# Altium PCB charger.PcbDoc (part 1 of 2)
Units mil, origin at the board's own origin, x right, y up, seen from the top; angles counter-clockwise.
Board outline 4340.74 x 2765.92 mil, 2 copper layers (Top Layer, Bottom Layer); 142 components, 73 nets, 399 pads, 1053 vias.
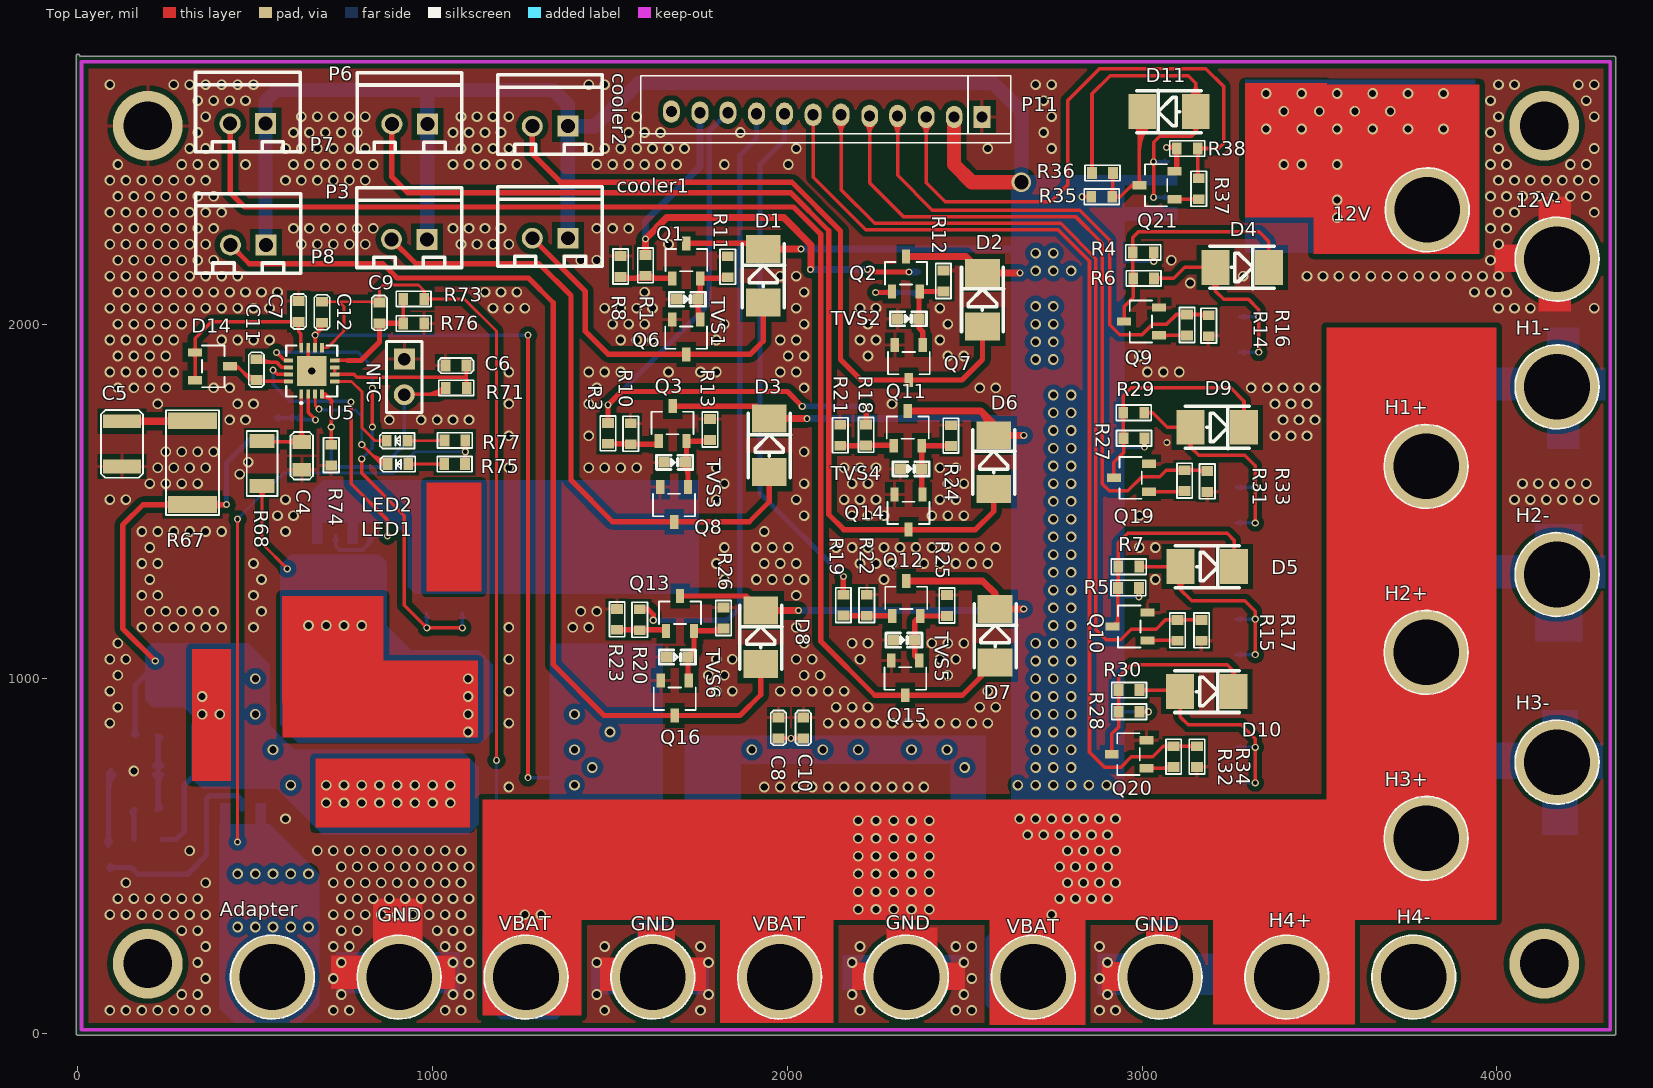
[diagram p0: Top Layer view]
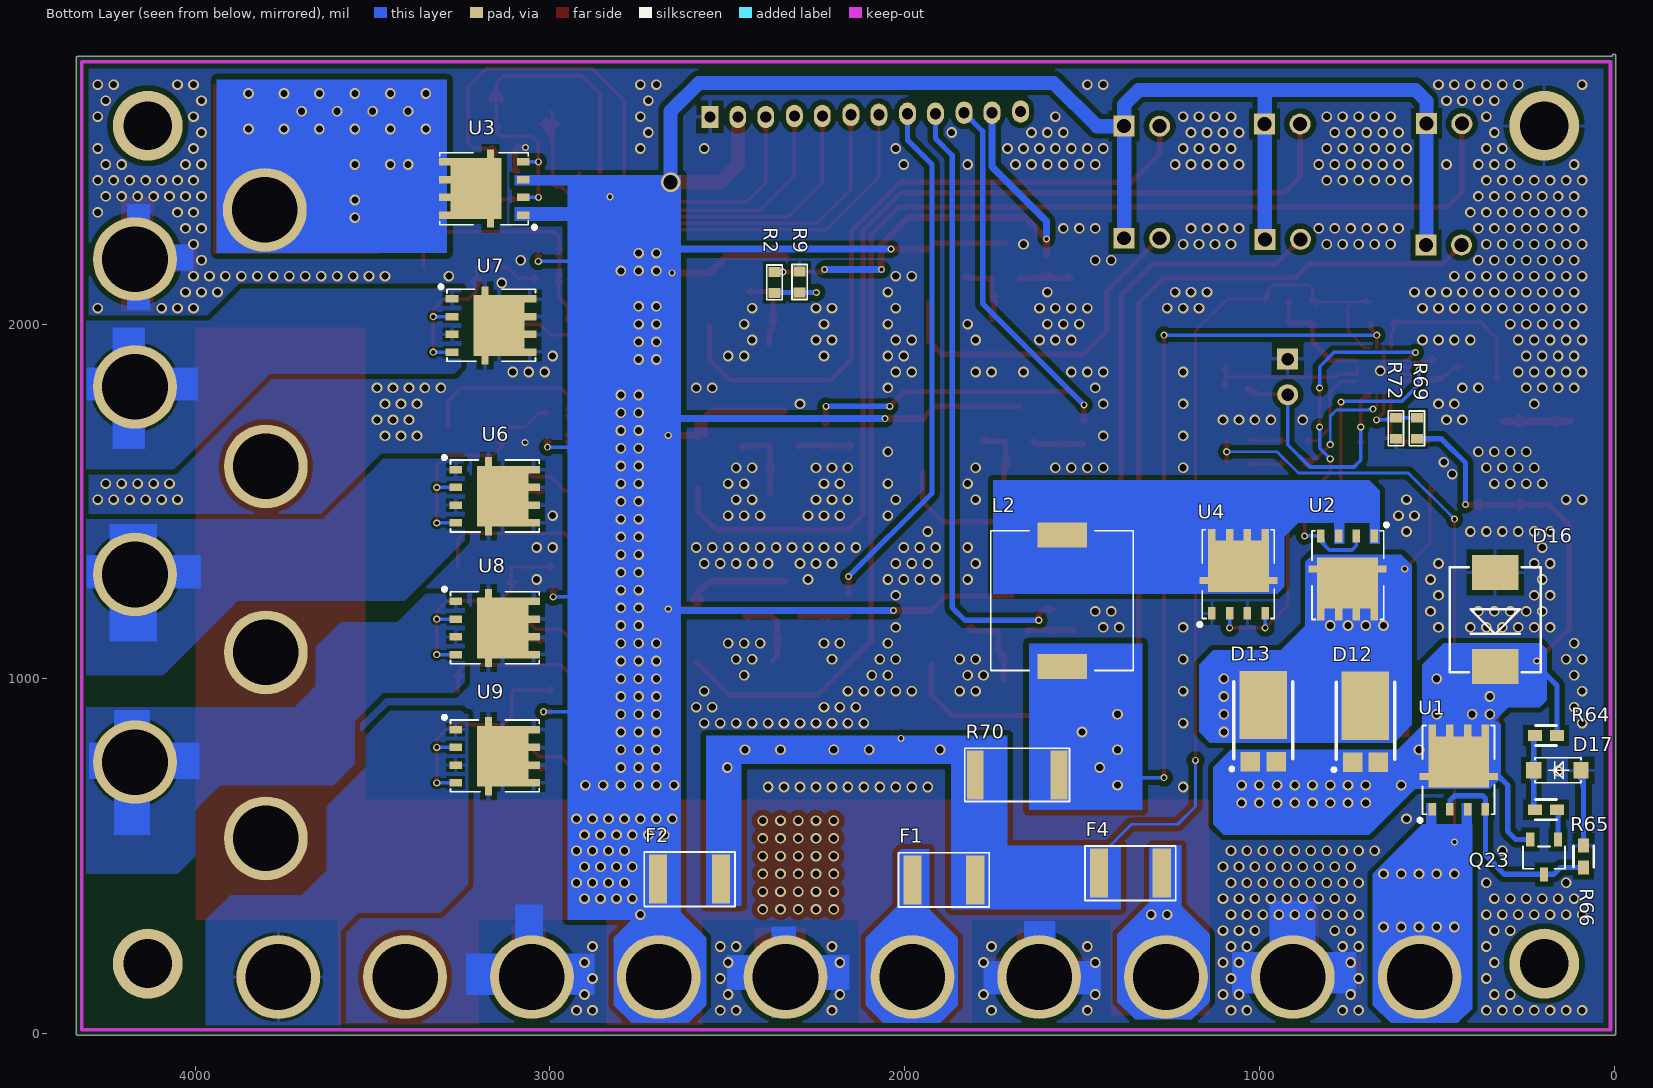
[diagram p1: Bottom Layer view, seen from below]

## Layer stack, top to bottom
Top Layer: signal copper 1.4
Dielectric: dielectric 12.6, FR-4, Dk 4.8
Bottom Layer: signal copper 1.4

## Board outline
-5.02,0 ccw(c0,0) 0,-5.02 4330.71,-5.02 ccw(c4330.71,0) 4335.72,0 4335.72,2750 ccw(c4330.71,2750) 4330.71,2755.02 5.02,2755.02 5.02,2755.91 ccw(c0,2755.91) -5.02,2755.91

## Design rules (kind name [scope] priority, off if disabled: settings)
Clearance Clearance_1 [InPolygon And InNet(GND)] p1: gap=15
Clearance [All] p2: gap=8
PolygonConnect PolygonConnect_1 [IsVia] p1: connectstyle=Direct reliefconductorwidth=10 reliefentries=4 polygonreliefangle="90 Angle"
PolygonConnect [All] p2: connectstyle=Relief reliefconductorwidth=10 reliefentries=4 polygonreliefangle="90 Angle"
RoutingVias [All] p1: holewidth=28 width=50 viastyle="Through Hole" minholewidth=28 minwidth=50 maxholewidth=28 maxwidth=50
SilkscreenOverComponentPads [IsPad] p1: minsilkscreentomaskgap=2
SolderMaskExpansion [All] p1: expansion=4
Width [All] p1: maxlimit=300 minlimit=5 preferedwidth=10
27 further rules are at their usual default settings.

## Classes and differential pairs
component class drv: 12V 12V- cooler1 cooler2 D1 D2 D3 D4 D5 D6 D7 D8 D9 D10 D11 H1+ H1- H2+ H2- H3+ H3- H4+ H4- P3 P6 P7 P8 P11 Q1 Q2 Q3 Q6 Q7 Q8 Q9 Q10 Q11 Q12 Q13 Q14 Q15 Q16 Q19 Q20 Q21 R1 R2 R3 R4 R5 R6 R7 R8 R9 R10 R11 R12 R13 R14 R15 R16 R17 R18 R19 R20 R21 R22 R23 R24 R25 R26 R27 R28 R29 R30 R31 R32 R33 R34 R35 R36 R37 R38 TVS1 TVS2 TVS3 TVS4 TVS5 TVS6 U3 U6 U7 U8 U9
component class charger: Adapter C4 C5 C6 C7 C8 C9 C10 C11 C12 D12 D13 D14 D16 D17 F1 F2 F4 GND L2 LED1 LED2 NTC Q23 R64 R65 R66 R67 R68 R69 R70 R71 R72 R73 R74 R75 R76 R77 U1 U2 U4 U5 VBAT
component class "New Class": 12V 12V- Adapter H1+ H1- H2+ H2- H3+ H3- H4+ H4- VBAT

## Components (designator, comment, footprint, x,y, rotation, side; value= is the part's Value field where it differs from the comment)
12V "12V" FIX-4.5 3804,2322 r0 top locked (schematic designator T1)
12V- "12V-" FIX-4.5 4170,2183 r0 top locked (schematic designator T2)
Adapter "12V" FIX-4.5 548,159 r0 top locked (schematic designator T4)
C4 "1uF/25V" 0805C 631,1668 r270 top
C5 "2.2uF/25V" 1210C 124,1726 r270 top
C6 "1uF/25V" 0603C 1036.06,1883 r0 top
C7 "1uF/25V" 0603C 622,2006 r90 top
C8 "10uF/25V" 0603C 1975,891 r270 top
C9 "22pF" 0603C 850,2002 r90 top
C10 "10uF/25V" 0603C 2045,891 r270 top
C11 "0.1uF/25V" 0603C 503,1901 r270 top
C12 "0.1uF/25V" 0603C 688,2063 r270 top
cooler1 "SIP-2" SIP-2A 1331,2242 r180 top (schematic designator P1)
cooler2 "SIP-2" SIP-2A 1331,2558 r180 top (schematic designator P2)
D1 "1N4007" DO-214-AC 1932,2136 r90 top
D2 "1N4007" DO-214-AC 2550,2069 r90 top
D3 "1N4007" DO-214-AC 1949,1658 r90 top
D4 "1N4007" DO-214-AC 3282,2160 r0 top
D5 "1N4007" DO-214-AC 3184,1316 r0 top
D6 "1N4007" DO-214-AC 2582,1611 r90 top
D7 "1N4007" DO-214-AC 2586,1121 r90 top
D8 "1N4007" DO-214-AC 1925,1117 r90 top
D9 "1N4007" DO-214-AC 3212,1709 r0 top
D10 "1N4007" DO-214-AC 3183,964 r0 top
D11 "1N4007" DO-214-AC 3076,2599 r180 top
D12 "PDS1040-13" POWERDI-5_L5.4-W4.0-LS6.5-RD 701,844 r270 bottom
D13 "PDS1040-13" POWERDI-5_L5.4-W4.0-LS6.5-RD 989,846 r270 bottom
D14 "bat54c" sot23-3 330.35,1920 r180 top
D16 "SMCJ28CA" SMC 335,1300 r270 bottom
D17 "BZT52C27" sod123 93,742 r0 bottom
F1 "1812L300/16GR" 1812-F 1978,433 r180 bottom
F2 "1812L300/16GR" 1812-F 2695,435 r180 bottom
F4 "1812L300/16GR" 1812-F 1275,452 r0 bottom
GND "GND" FIX-4.5 905.56,159 r0 top locked (schematic designator T5)
GND "GND" FIX-4.5 2335.78,159 r180 top locked (schematic designator T6)
GND "GND" FIX-4.5 3050.89,159 r180 top locked (schematic designator T8)
GND "GND" FIX-4.5 1620.67,159 r180 top locked (schematic designator T10)
H1+ "12V" FIX-4.5 3801,1598.67 r180 top locked
H1- "12V" FIX-4.5 4170,1823 r270 top locked
H2+ "12V" FIX-4.5 3801,1074.33 r270 top locked
H2- "12V" FIX-4.5 4170,1294 r270 top locked
H3+ "12V" FIX-4.5 3801,550 r270 top locked
H3- "12V" FIX-4.5 4170,765 r270 top locked
H4+ "12V" FIX-4.5 3408.44,159 r270 top locked
H4- "12V" FIX-4.5 3766,159 r270 top locked
L2 "SMMS1040-3R3M" MSS1038 1556,1405 r270 bottom
LED1 "5V" 0603LED 931.45,1605.22 r180 top
LED2 "5V" 0603LED 929.45,1671.22 r180 top
NTC "NCP18XH103F03RB" HDR1X2 920,1901 r270 top
P3 "SIP-2" SIP-2A 934,2239 r180 top
P6 "SIP-2" SIP-2A 935,2564 r180 top
P7 "SIP-2" SIP-2A 479,2565 r180 top
P8 "SIP-2" SIP-2A 480,2223 r180 top
P11 "Header 11" 12X2MMZ 2549,2584 r180 top
Q1 "BC817-16" SOT23-3 1676,2129 r270 top
Q2 "BC817-16" SOT23-3 2295,2092 r270 top
Q3 "BC817-16" SOT23-3 1637,1670 r270 top
Q6 "AO3400" SOT23-3 1754,2013 r90 top
Q7 "AO3400" SOT23-3 2382,1941 r90 top
Q8 "AO3400" SOT23-3 1720,1541 r90 top
Q9 "S8050" SOT23-3 3048,1968 r0 top
Q10 "S8050" SOT23-3 3015,1108 r0 top
Q11 "BC817-16" SOT23-3 2300,1657 r270 top
Q12 "BC817-16" SOT23-3 2296,1177 r270 top
Q13 "BC817-16" SOT23-3 1658,1135 r270 top
Q14 "AO3400" SOT23-3 2381,1519 r90 top
Q15 "AO3400" SOT23-3 2372,1052 r90 top
Q16 "AO3400" SOT23-3 1722,995 r90 top
Q19 "S8050" SOT23-3 3019,1527 r0 top
Q20 "S8050" SOT23-3 3013,748 r0 top
Q21 "S8050" SOT23-3 3091,2352 r0 top
Q23 "MMBT4403-7-F" SOT23-3 158,547 r90 bottom
R1 "100R" 0603R 1600,2136 r90 top
R2 "100R" 0603R 2367,2087.94 r90 bottom
R3 "100R" 0603R 1494.35,1662.32 r90 top
R4 "10K" 0603R 2974,2202 r0 top
R5 "10K" 0603R 2932,1256 r0 top
R6 "100" 0603R 2975,2129 r0 top
R7 "100" 0603R 2933,1316 r0 top
R8 "10K" 0603R 1530,2192 r270 top
R9 "10K" 0603R 2296,2148.06 r270 bottom
R10 "10K" 0603R 1558.35,1720.32 r270 top
R11 "10K" 0603R 1832,2132 r90 top
R12 "10K" 0603R 2440,2092 r90 top
R13 "10K" 0603R 1782,1673 r90 top
R14 "1K" 0603R 3127,1968 r90 top
R15 "1K" 0603R 3100,1107 r90 top
R16 "1K" 0603R 3188,2025 r270 top
R17 "1K" 0603R 3168,1166 r270 top
R18 "100R" 0603R 2222,1658 r90 top
R19 "100R" 0603R 2158,1178 r90 top
R20 "100R" 0603R 1584,1137 r90 top
R21 "10K" 0603R 2149,1716 r270 top
R22 "10K" 0603R 2224,1237 r270 top
R23 "10K" 0603R 1520,1197 r270 top
R24 "10K" 0603R 2461,1656 r90 top
R25 "10K" 0603R 2450,1177 r90 top
R26 "10K" 0603R 1820,1142 r90 top
R27 "10K" 0603R 2948,1678 r0 top
R28 "10K" 0603R 2934,907 r0 top
R29 "100" 0603R 2947,1750 r0 top
R30 "100" 0603R 2934,968 r0 top
R31 "1K" 0603R 3120,1529 r90 top
R32 "1K" 0603R 3089,751 r90 top
R33 "1K" 0603R 3184,1586 r270 top
R34 "1K" 0603R 3155,810 r270 top
R35 "10K" 0603R 2916,2359 r180 top
R36 "100" 0603R 2918,2426 r180 top
R37 "1K" 0603R 3160,2352 r90 top
R38 "10K" 0603R 3157,2495 r180 top
R64 "100k" RESC1608X055N_0603 192,840 r180 bottom
R65 "1k/1%" RESC1608X055N_0603 192,631 r180 bottom
R66 "10k" RESC1608X055N_0603 86,499 r90 bottom
R67 "2/1W" 2512R 323,1491 r90 top
R68 "10/1/4W" 1206R 519,1543 r90 top
R69 "215k" 0603R 555.65,1676.56 r90 bottom
R70 "5mR" 2512R 1565,729 r0 bottom
R71 "5.23K" 0603R 1096.06,1820 r180 top
R72 "11.8K" 0603R 615,1736 r270 bottom
R73 "698K" 0603R 976,2071 r180 top
R74 "30.1K" 0603R 714,1660 r270 top
R75 "1k/1%" 0603R 1032.45,1605.22 r0 top
R76 "100K" 0603R 917,2001.65 r0 top
R77 "1k/1%" 0603R 1033,1672 r0 top
TVS1 "ESD5Z5.0CT1G" SOD-523 1718,2070 r0 top
TVS2 "ESD5Z5.0CT1G" SOD-523 2341,2015 r0 top
TVS3 "ESD5Z5.0CT1G" SOD-523 1682,1610 r0 top
TVS4 "ESD5Z5.0CT1G" SOD-523 2349,1592 r0 top
TVS5 "ESD5Z5.0CT1G" SOD-523 2329,1109 r0 top
TVS6 "ESD5Z5.0CT1G" SOD-523 1690,1061 r0 top
U1 "Si7997DP" "PowerPAK SO-8" 539,595 r90 bottom
U2 "Si7288DP" "PowerPAK SO-8" 650,1440 r270 bottom
U3 "Si7997DP" "PowerPAK SO-8" 3038,2281 r0 bottom
U4 "Si7288DP" "PowerPAK SO-8" 1160,1147 r90 bottom
U5 "BQ24650RVAR" VQFN-16_L3.6-W3.6-P0.50-BL-EP 659,1868 r0 top
U6 "Si7997DP" "PowerPAK SO-8" 3303.5,1615.81 r180 bottom
U7 "Si7997DP" "PowerPAK SO-8" 3313.5,2097.21 r180 bottom
U8 "Si7997DP" "PowerPAK SO-8" 3303.5,1244.4 r180 bottom
U9 "Si7997DP" "PowerPAK SO-8" 3303.5,883 r180 bottom
VBAT "12V" FIX-4.5 1263.11,159 r180 top locked (schematic designator T3)
VBAT "12V" FIX-4.5 1978.22,159 r180 top locked (schematic designator T7)
VBAT "12V" FIX-4.5 2693.33,159 r180 top locked (schematic designator T9)

## Footprints (in the part's own frame and the unit in brackets; to place one, negate y for a bottom-side part, rotate by r counter-clockwise, add the part's x,y. Pads: shape width x height; smd on the part's side, far side on the other; paste and mask are expansions set on the pad)
12X2MMZ [mm]
  rect 1.2x1.6 hole 0.8: 1(0,0)
  oval 1.2x1.6 hole 0.8: 2(2,0) 3(4,0) 4(6.05,-0.076) 5(8.05,-0.076) 6(10.1,-0.152) 7(12.1,-0.152) 8(14.15,-0.229) 9(16.15,-0.229) 10(18.2,-0.305) 11(20.2,-0.305) 12(22.25,-0.381)
  silkscreen extent -2.05,-2.95 24.43,1.85
0603C [mm]
  rect 0.7x0.85 smd: 1(0,0) 2(1.5,0)
  silkscreen extent -0.5,-0.55 2,0.55
0603LED [mm]
  rect 0.7x0.85 smd: 1(0,0) 2(1.5,0)
  silkscreen extent -0.5,-0.55 2,0.55
0603R [mm]
  rect 0.7x0.85 smd: 1(0,0) 2(1.5,0)
  silkscreen extent -0.5,-0.55 2,0.55
0805C [mm]
  rect 1x1.3 smd: 1(0,0) 2(2,0)
  silkscreen extent -0.7,-0.8 2.7,0.8
1206R [mm]
  rect 1x1.8 smd: 1(0,0) 2(3.25,0)
  silkscreen extent -0.7,-1.1 3.95,1.1
1210C [mm]
  rect 1x2.7 smd: 1(0,0) 2(3.25,0)
  silkscreen extent -0.8,-1.5 4.05,1.5
1812-F [mm]
  rect 1.3x3.5 smd: 1(0,0) 2(4.5,0)
  silkscreen extent -1,-1.95 5.5,1.95
2512R [mm]
  rect 1.2x3.5 smd: 1(0,0) 2(6,0)
  silkscreen extent -0.75,-1.9 6.75,1.9
DO-214-AC [mm]
  rect 2x2.5 smd: 1(-1.915,0) 2(1.915,0)
  silkscreen extent -2.3,-1.52 2.3,1.5, body extent -2.3,-1.35 2.3,1.35, height 2.4
FIX-4.5 [mm]
  round 6 hole 4.7: 1(0,0)
  silkscreen extent -3,-3 3,3
HDR1X2 [mm] "Connector; Header; 2 Position"
  rect 1.5x1.5 hole 0.9: 1(0,0)
  round 1.5 hole 0.9: 2(2.54,0)
  silkscreen extent -1.27,-1.27 3.81,1.27
MSS1038 [mm]
  rect 1.78x3.56 smd: 1(0,0) 2(9.4,0)
  silkscreen extent -0.3,-5.11 9.7,5.09
POWERDI-5_L5.4-W4.0-LS6.5-RD [mm]
  rect 1.4x1.4 smd: 1(2.032,-0.92) 2(2.032,0.92)
  rect 4.9x3.4 smd: 3(-2.032,0)
  silkscreen extent -3.7,-2.37 2.67,2.1
"PowerPAK SO-8" [mm]
  rect 0.9x0.54 smd: 1(0.95,-0.67) 2(0.95,-1.94) 3(0.95,-3.21) 4(0.95,-4.48) 5(6.548,-4.48) 6(6.548,-3.21) 7(6.548,-1.94) 8(6.548,-0.67)
  rect 0.5x1.6 smd: 5(3.3,-4.575) 8(3.3,-0.575)
  rect 3.66x2.5 smd: 5(4.325,-3.495)
  rect 3.66x2 smd: 8(4.325,-1.401)
  silkscreen extent 0.03,-5.12 6.93,0.33
RESC1608X055N_0603 [mil] "Chip Resistor, 0603"
  round 10 on Mech3: 0(0,0)
  rect 40x30 smd: 1(-30.98,0) 2(30.98,0)
  silkscreen extent -30,-29 30,29, body extent -31,-16 31,16, height 22
SIP-2A [mm]
  rect 1.5x1.5 hole 1: 1(-1.27,0)
  round 1.5 hole 1: 2(1.27,0)
  silkscreen extent -3.75,-3.68 3.75,2.02, body extent -3.7,-3.81 3.7,2.29, height 7.5
SMC [mm]
  rect 2.5x3.3 smd: 1(0,0) 2(6.75,0)
  silkscreen extent -0.35,-3.25 7.15,3.25
sod123 [mm]
  rect 1.1x1.2 smd: 1(0,0) 2(3.385,0)
  silkscreen extent 0,-0.9 3.3,0.9
SOD-523 [mil]
  rect 31.5x30 smd: 1(-30,0) 2(30,0)
  silkscreen extent -51,-20 51,20, body extent -31,-16 31,16, height 26
sot23-3 [mm]
  rect 1x0.6 smd: 1(0,0) 2(0,2) 3(-2.5,1)
  silkscreen extent -2.1,-0.5 -0.5,2.5
SOT23-3 [mm]
  rect 1x0.6 smd: 1(0,0) 2(0,2) 3(-2.5,1)
  silkscreen extent -2.1,-0.5 -0.5,2.5
VQFN-16_L3.6-W3.6-P0.50-BL-EP [mm]
  rect 0.28x0.665 smd: 1(-0.75,-1.658) 2(-0.25,-1.658) 3(0.25,-1.658) 4(0.75,-1.658) 9(0.75,1.658) 10(0.25,1.658) 11(-0.25,1.658) 12(-0.75,1.658)
  rect 0.665x0.28 smd: 5(1.658,-0.75) 6(1.658,-0.25) 7(1.658,0.25) 8(1.658,0.75) 13(-1.658,0.75) 14(-1.658,0.25) 15(-1.658,-0.25) 16(-1.658,-0.75)
  rect 2.14x2.14 smd: 17(0,0)
  silkscreen extent -1.83,-2.36 1.83,1.83

## Part data
12V 12V- Adapter GND GND GND GND H1+ H1- H2+ H2- H3+ H3- H4+ H4- VBAT VBAT VBAT: library part TP
C4 C5 C6 C7 C8 C9 C10 C11 C12: library part CAP, "Capacitor"
cooler1 cooler2 P3 P6 P7 P8: "XH2.54 2P 立贴"
D1 D2 D3 D4 D5 D6 D7 D8 D9 D10 D11: library part DIODE2, "贴片二极管"
D14: library part PDS1040-13
D16: library part "DIODE S", "Schottky Diode"
D17: library part BZT52C12S-7-F
F1 F2 F4: library part "Fuse 1", "Fuse"
L2: library part INDUCTOR
LED1 LED2: library part LED
NTC: library part "Header 2", "XH2.54 2P 立贴"
P11: "Header, 11-Pin"
Q1 Q2 Q3 Q11 Q12 Q13: library part NPN-1, "三极管"
Q6 Q7 Q8 Q14 Q15 Q16: library part "MOSFET N", "MOSFET N"
Q9 Q10 Q19 Q20 Q21: library part NPN, "NPN Bipolar Transistor"
Q23: library part OEM_Diodes_MMBT4403
R1 R2 R3 R6 R7 R8 R9 R10 R11 R12 R13 R18 R19 R20 R21 R22 R23 R24 R25 R26 R29 R30 R36: library part RES-SOP, "贴片电阻 5%"
R4 R5 R14 R15 R16 R17 R27 R28 R31 R32 R33 R34 R35 R37 R38 R67 R68 R69 R70 R71 R72 R73 R74 R76: library part Res1, "Resistor"
R64 R65 R66: library part Resistor_0603
R75 R77: library part R
TVS1 TVS2 TVS3 TVS4 TVS5 TVS6: library part TVS-1, "TVS"
U1 U3 U6 U7 U8 U9: "Sia430DJ"
U2 U4: library part Si7997DP, "Sia430DJ"

## Free pads (board coordinates)
  round 196.85 hole 137.8: 1(196.85,196.85) 1(196.85,2559.06) 1(4133.86,196.85) 1(4133.86,2559.06)

## Via types
v1: diameter 30, hole 20, Top Layer to Bottom Layer, tented both sides, 995 vias
v2: diameter 20, hole 12, Top Layer to Bottom Layer, tented both sides, 57 vias
v3: diameter 55, hole 40, Top Layer to Bottom Layer, tented both sides, 1 vias

## Nets (pads, with @x,y where several pads share a name; then routed paths per layer and width w, separated by ;. In a path a pad name is that pad's centre, name@x,y a point inside that pad or via, vN(x,y) a via of type N, cw(c..) or ccw(c..) an arc to the next point about the centre after c; other vN are vias at no path point)
AIR_12V: 12V.1 U3.5 U3.6 U3.7 U3.8
  other v1: 3550,2300 3550,2350 3400,2450 3450,2450 3550,2450 3350,2550 3450,2550 3550,2550 3650,2550 3750,2550 3850,2550 3400,2600 3500,2600 3600,2600 3700,2600 3350,2650 3450,2650 3550,2650 3650,2650 3750,2650 3850,2650
AIR_PWR: P11.3 R37.2 R38.1 | length 1856.5
  Top Layer w10: P11.3@2378.35,2562.96 cw(c2346.56,2531.17) 2391.52,2531.17 cw(c2436.48,2531.17) P11.3@2404.69,2562.96 ; P11.3@2391.52,2584 2391.52,2398.48 2445,2345 2743,2345 2790,2392 2790,2630 2880,2720 3180,2720 3230,2670 3230,2510 3215,2495 R38.1@3157,2495 3157,2414.06 R37.2@3160,2411.06 ; R38.1@3150.79,2485.84 cw(c3135.8,2470.85) 3157,2470.85 cw(c3178.2,2470.85) R38.1@3163.21,2485.84 ; R37.2@3150.84,2417.26 ccw(c3135.97,2432.14) 3157,2432.14 ; 3157,2432.36 ccw(c3178.36,2432.36) R37.2@3163.26,2417.26 ; R38.1@3163.21,2488.79 cw(c3178.2,2473.8) 3178.2,2495 cw(c3178.2,2516.2) R38.1@3163.21,2501.21
BAT_CHARGE: cooler1.1 cooler2.1 D1.2 D2.2 D3.2 D6.2 D7.2 D8.2 F1.1 F2.1 F4.1 H1+.1 H2+.1 H3+.1 H4+.1 P3.1 P6.1 P7.1 P8.1 P11.2 Q1.3 Q2.3 Q3.3 Q11.3 Q12.3 Q13.3 R4.2 R5.2 R27.2 R28.2 R35.2 U3.1 U3.3 VBAT.1 | length 9174.4
  Top Layer w10: v2(2831,2359) R35.2@2856.94,2359 ; v2@2834.54,2355.46 cw(c2843.07,2346.93) 2843.07,2359 cw(c2843.07,2371.07) v2@2834.54,2362.54 ; R35.2@2850.74,2352.79 ccw(c2835.75,2337.8) 2835.75,2359 ccw(c2835.75,2380.2) R35.2@2850.74,2365.21 ; R5.2@2984.85,1246.84 cw(c2969.86,1231.85) 2991.06,1231.85 cw(c3012.25,1231.85) R5.2@2997.26,1246.84 ; v2@2987.52,1234.48 ccw(c2978.98,1243.02) 2991.06,1243.02 ccw(c3003.13,1243.02) v2@2994.59,1234.48 ; v2(2991.06,1230.94) R5.2@2991.06,1256 ; R28.2@2993.06,907 v2(3018.11,907) ; R28.2@2999.26,900.79 cw(c3014.25,885.8) 3014.25,907 cw(c3014.25,928.2) R28.2@2999.26,913.21 ; R27.2@3000.85,1668.84 cw(c2985.86,1653.85) 3007.06,1653.85 cw(c3028.25,1653.85) R27.2@3013.26,1668.84 ; v2@3003.52,1656.48 ccw(c2994.98,1665.02) 3007.06,1665.02 ccw(c3019.13,1665.02) v2@3010.59,1656.48 ; v2(3007.06,1652.94) R27.2@3007.06,1678 ; v2@3014.57,903.46 ccw(c3006.04,894.93) 3006.04,907 ccw(c3006.04,919.07) v2@3014.57,910.54 ; R4.2@3026.85,2192.84 cw(c3011.86,2177.85) 3033.06,2177.85 cw(c3054.25,2177.85) R4.2@3039.26,2192.84 ; v2@3029.52,2180.48 ccw(c3020.98,2189.02) 3033.06,2189.02 ccw(c3045.13,2189.02) v2@3036.59,2180.48 ; v2(3033.06,2176.94) R4.2@3033.06,2202
  Top Layer w15: Q3.3@1676.37,1768.43 1913.97,1768.43 D3.2@1949,1733.39 ; Q13.3@1697.37,1233.43 1883.97,1233.43 D8.2@1925,1192.39 ; Q1.3@1715.37,2227.43 1915.97,2227.43 D1.2@1932,2211.39
  Top Layer w20: P3.1@985,2232 P3.1@988,2229 ; cooler1.1@1381,2238 cooler1.1@1387,2232 ; D8.2@1925,1192.39 v2(2031.61,1192.39) ; D1.2@1932,2211.39 v2(2038.61,2211.39) ; D3.2@1949,1733.39 v2(2055.61,1733.39) ; Q2.3@2334.37,2190.43 2503.97,2190.43 D2.2@2550,2144.39 v2(2655.61,2144.39) ; Q12.3@2335.37,1275.43 2550.57,1275.43 2586,1240 ; Q11.3@2339.37,1755.43 2544.57,1755.43 2582,1718 D6.2@2582,1686.39 v2(2666.39,1686.39) ; 2547.38,1752.62 cw(c2502.48,1707.72) D6.2@2563.2,1689.14 ; 2570.91,1729.09 cw(c2538.51,1696.69) D6.2@2582.32,1683.28 ; D7.2@2574.96,1223.61 ccw(c2568.32,1240) 2586,1240 ; D7.2@2597.04,1223.61 cw(c2603.68,1240) 2586,1240 ; v2(2666.39,1196.39) D7.2@2586,1196.39 2586,1240
  Top Layer w40: P11.2@2470.26,2584 2470.26,2449.74 2520,2400 v3(2660,2400)
  Bottom Layer w10: 2912.94,1652.94 v2(3007.06,1652.94) ; 2920.94,1230.94 v2(2991.06,1230.94) ; 2933,907 v2(3018.11,907) ; 2933.06,2176.94 v2(3033.06,2176.94) ; v2@2987.52,1227.41 ccw(c2978.98,1218.87) 2978.98,1230.94 ccw(c2978.98,1243.02) v2@2987.52,1234.48 ; v2@3003.52,1649.41 ccw(c2994.98,1640.87) 2994.98,1652.94 ccw(c2994.98,1665.02) v2@3003.52,1656.48 ; v2@3014.57,903.46 ccw(c3006.04,894.93) 3006.04,907 ccw(c3006.04,919.07) v2@3014.57,910.54 ; v2@3029.52,2173.41 ccw(c3020.98,2164.87) 3020.98,2176.94 ccw(c3020.98,2189.02) v2@3029.52,2180.48
  Bottom Layer w20: v2(2031.61,1192.39) 2697.61,1192.39 ; v2(2038.61,2211.39) v1@2701.39,2211.39 ; v2(2055.61,1733.39) 2686.61,1733.39 ; 2656.74,1192.39 ccw(c2656.74,1206.05) v2(2666.39,1196.39) ccw(c2676.05,1206.05) 2676.05,1192.39 ; 2660.42,2211.39 cw(c2660.42,2160.42) v1@2696.46,2196.46
  Bottom Layer w40: P8.1@530,2223 529,2224 P7.1@529,2565 529,2629 560,2660 1340,2660 1381,2619 cooler2.1@1381,2558 ; P3.1@984,2239 985,2240 P6.1@985,2564 985,2655 ; cooler1.1@1381,2242 cooler2.1@1381,2558 ; v3(2660,2400) 2660,2600 2580,2680 1580,2680 1458,2558 cooler2.1@1381,2558
  other v1: 1260,335 1260,335 1260,335 1260,335 1305,335 1305,335 1305,335 1305,335 2745,335 2745,335 2745,335 2745,335 2200,350 2250,350 2300,350 2350,350 2400,350 2767.5,380 2767.5,380 2767.5,380 2767.5,380 2812.5,380 2812.5,380 2812.5,380 2812.5,380 2857.5,380 2857.5,380 2857.5,380 2857.5,380 2902.5,380 2902.5,380 2902.5,380 2902.5,380 2200,400 2250,400 2300,400 2350,400 2400,400 2790,425 2790,425 2790,425 2790,425 2835,425 2835,425 2835,425 2835,425 2880,425 2880,425 2880,425 2880,425 2925,425 2925,425 2925,425 2925,425 2200,450 2250,450 2300,450 2350,450 2400,450 2767.5,470 2767.5,470 2767.5,470 2767.5,470 2812.5,470 2812.5,470 2812.5,470 2812.5,470 2857.5,470 2857.5,470 2857.5,470 2857.5,470 2902.5,470 2902.5,470 2902.5,470 2902.5,470 2200,500 2250,500 2300,500 2350,500 2400,500 2790,515 2790,515 2790,515 2790,515 2835,515 2835,515 2835,515 2835,515 2880,515 2880,515 2880,515 2880,515 2925,515 2925,515 2925,515 2925,515 2200,550 2250,550 2300,550 2350,550 2400,550 2677.5,560 2677.5,560 2677.5,560 2677.5,560 2722.5,560 2722.5,560 2722.5,560 2722.5,560 2767.5,560 2767.5,560 2767.5,560 2767.5,560 2812.5,560 2812.5,560 2812.5,560 2812.5,560 2857.5,560 2857.5,560 2857.5,560 2857.5,560 2902.5,560 2902.5,560 2902.5,560 2902.5,560 2200,600 2250,600 2300,600 2350,600 2400,600 2655,605 2655,605 2655,605 2655,605 2700,605 2700,605 2700,605 2700,605 2745,605 2745,605 2745,605 2745,605 2790,605 2790,605 2790,605 2790,605 2835,605 2835,605 2835,605 2835,605 2880,605 2880,605 2880,605 2880,605 2925,605 2925,605 2925,605 2925,605 2650,700 2700,700 2750,700 2800,700 2850,700 2900,700 2700,750 2750,750 2800,750 2700,800 2750,800 2800,800 2700,850 2750,850 2800,850 2700,900 2750,900 2800,900 2700,950 2750,950 2800,950 2700,1000 2750,1000 2800,1000 2700,1050 2750,1050 2800,1050 2700,1100 2750,1100 2800,1100 2750,1150 2800,1150 2750,1200 2800,1200 2750,1250 2800,1250 2750,1300 2800,1300 2750,1350 2800,1350 2750,1400 2800,1400 2750,1450 2800,1450 2750,1500 2800,1500 2750,1550 2800,1550 2750,1600 2800,1600 2750,1650 2800,1650 2750,1700 2800,1700 2750,1750 2800,1750 2750,1800 2800,1800 2700,1900 2750,1900 2700,1950 2750,1950 2700,2000 2750,2000 2700,2050 2750,2050 2700,2150 2750,2150 2800,2150 2700,2200 2750,2200
BAT_CHARGE_O: C8.2 C9.2 C10.2 C12.1 F1.2 F2.2 F4.2 R70.2 R73.1 U5.9 | length 3034.7
  Top Layer w8: C12.1@688,2063 737,2063 ; U5.9@688.53,1933.26 703.26,1933.26 750,1980 750,2050 737,2063 ; C12.1@697.87,2056.08 cw(c714.56,2039.39) 714.56,2063 cw(c714.56,2086.61) C12.1@697.87,2069.92 ; 818.74,2063 cw(c818.74,2032.75) C9.2@840.13,2054.14 ; 828.13,2063 ccw(c828.13,2079.97) C9.2@840.13,2067.97 ; C9.2@843.08,2067.97 ccw(c826.39,2084.66) 850,2084.66 ccw(c873.61,2084.66) C9.2@856.92,2067.97 ; R73.1@969.98,2081.66 ccw(c960.34,2094) 976,2094 ; R73.1@982.02,2081.66 cw(c991.66,2094) 976,2094 ; R73.1@982.92,2064.08 cw(c999.61,2047.39) 999.61,2071 cw(c999.61,2094.61) R73.1@982.92,2077.92 ; v2@1175.76,774.24 ccw(c1165.51,784.49) 1180,784.49 ccw(c1194.49,784.49) v2@1184.24,774.24 ; v2(1180,770) 1180,1980 1089,2071 R73.1@976,2071 976,2094 ; C8.2@1975,831.94 C10.2@2045,831.94 ; C8.2@1984.87,825.03 cw(c2001.56,808.34) 2001.56,831.94 cw(c2001.56,855.55) C8.2@1984.87,838.86 ; v2@2005.76,827.7 ccw(c1995.51,817.46) 1995.51,831.94 ccw(c1995.51,846.43) v2@2005.76,836.19 ; v2@2014.24,827.7 cw(c2024.49,817.46) 2024.49,831.94 cw(c2024.49,846.43) v2@2014.24,836.19 ; C10.2@2035.13,825.03 ccw(c2018.44,808.34) 2018.44,831.94 ccw(c2018.44,855.55) C10.2@2035.13,838.86 ; 737,2063 848.06,2063 C9.2@850,2061.06 850,2100 860,2110 960,2110 976,2094
  Bottom Layer w8: v2@1175.76,765.76 cw(c1165.51,755.51) 1180,755.51 cw(c1194.49,755.51) v2@1184.24,765.76 ; v2(1180,770) 1180,640 1230,590 1360,590 1452.17,497.83 F4.2@1452.17,452 ; 1413.52,536.48 cw(c1372.35,495.31) F4.2@1430.57,495.31 ; 1419.62,530.38 ccw(c1452.17,562.92) F4.2@1452.17,516.9 ; 1427.18,522.82 cw(c1399.66,495.31) F4.2@1438.57,495.31 ; F4.2@1433.28,516.72 ccw(c1452.17,535.61) F4.2@1452.17,508.9
  other v1: 2500,750 1900,800 2100,800 2200,800 2350,800 2450,800
  other v2: 2010,831.94
COOL1: P11.11 R1.2 R2.2 | length 1362.8
  Top Layer w15: v2(2226,2154) 2233,2147 2337,2147 v2(2343,2147)
  Top Layer w20: R1.2@1600,2195.06 v2(1600,2240) 1660,2300 1990,2300 2066.61,2223.39 2066.61,2155.61 v2(2065,2154)
  Bottom Layer w20: v2(1600,2240) 1600,2290 1753.72,2443.72 P11.11@1753.72,2596 ; v2(2065,2154) v2(2226,2154) ; v2(2343,2147) R2.2@2367,2147
COOL2: P11.10 R3.2 R18.2 | length 1873.9
  Top Layer w15: R3.2@1489.91,1725.81 ccw(c1479.19,1736.53) 1494.35,1736.53 ccw(c1509.51,1736.53) R3.2@1498.79,1725.81 ; R3.2@1494.35,1721.37 v2(1494.35,1772.32) 1532.03,1810 2000,1810 v2(2042,1768) ; R18.2@2217.56,1721.5 ccw(c2206.84,1732.22) 2222,1732.22 ccw(c2237.16,1732.22) R18.2@2226.44,1721.5 ; R18.2@2222,1717.06 v2(2222,1768)
  Bottom Layer w15: v2(1494.35,1772.32) 1780,2057.97 1780,2543.54 P11.10@1832.46,2596 ; v2(2042,1768) v2(2222,1768)
COOL3: P11.8 R19.2 | length 1505.6
  Top Layer w15: R19.2@2153.56,1241.5 ccw(c2142.84,1252.22) 2158,1252.22 ccw(c2173.16,1252.22) R19.2@2162.44,1241.5 ; R19.2@2158,1237.06 v2(2158,1288)
  Bottom Layer w15: P11.8@1991.91,2593 1991.91,2518.91 1923,2450 1923,1523 v2(2158,1288)
COOL4: P11.9 R20.2 | length 1754.5
  Top Layer w15: R20.2@1584,1196.06 1606.94,1196.06 1622,1181 v2(1622,1165) ; R20.2@1591.39,1191.61 cw(c1602.11,1180.89) 1602.11,1196.06 cw(c1602.11,1211.22) R20.2@1591.39,1200.5
  Bottom Layer w15: v2(1622,1165) 1830,1165 1866,1201 1866,2476 1913.17,2523.17 P11.9@1913.17,2593
GND: 12V-.1 C4.2 C5.2 C6.1 C7.2 C8.1 C10.1 D16.1 D17.1 GND.1 NTC.1 P11.1 pad.1@196.85,2559.06 Q6.2 Q7.2 Q8.2 Q9.2 Q10.2 Q14.2 Q15.2 Q16.2 Q19.2 Q20.2 Q21.2 R8.1 R9.1 R10.1 R11.2 R12.2 R13.2 R16.2 R17.2 R21.1 R22.1 R23.1 R24.2 R25.2 R26.2 R33.2 R34.2 R38.2 R66.2 R72.2 R74.2 R76.2 TVS1.1 TVS2.1 TVS3.1 TVS4.1 TVS5.1 TVS6.1 U4.1 U4.3 U5.11 U5.17 U6.5 U6.6 U6.7 U6.8 U7.5 U7.6 U7.7 U7.8 U8.5 U8.6 U8.7 U8.8 U9.5 U9.6 U9.7 U9.8 | length 587.2
  Top Layer w10: U5.17@649.16,1891.76 ccw(c682.76,1891.76) v1(659,1868) 649.16,1877.84 U5.11@649.16,1933.26 ; 649.16,1915.9 ccw(c706.9,1915.9) U5.17@666.07,1875.07
  Top Layer w15: v2(3069,2498) 3094.94,2498 R38.2@3097.94,2495 3097.94,2435.05 3093.63,2430.74 Q21.2@3091,2430.74 ; 3082.67,2498 cw(c3082.67,2482.68) R38.2@3093.5,2493.51 ; 3082.9,2498 ccw(c3082.9,2513) R38.2@3093.5,2502.39 ; R38.2@3093.5,2487.61 cw(c3082.78,2476.89) 3097.94,2476.89 cw(c3113.1,2476.89) R38.2@3102.39,2487.61 ; 3097.94,2443.39 ccw(c3111.52,2443.39) Q21.2@3101.92,2433.79
  Bottom Layer w15: R66.2@80.7,540.29 ccw(c67.89,553.09) 86,553.09 ccw(c104.11,553.09) R66.2@91.3,540.29 ; R66.2@86,529.98 86,735 D17.1@93,742 ; 86,688.96 cw(c144.07,688.96) D17.1@103.01,730.02
  other v1: 90,65 135,65 180,65 225,65 270,65 315,65 360,65 720,65 765,65 1035,65 1080,65 1485,65 1755,65 2205,65 2475,65 2520,65 2880,65 2925,65 292.5,110 337.5,110 742.5,110 1057.5,110 1102.5,110 1462.5,110 1777.5,110 2182.5,110 2497.5,110 2902.5,110 360,155 720,155 1080,155 2520,155 2880,155 337.5,200 742.5,200 1057.5,200 1102.5,200 1462.5,200 1777.5,200 2182.5,200 2497.5,200 2902.5,200 360,245 720,245 765,245 1035,245 1080,245 1485,245 1755,245 2205,245 2475,245 2520,245 2880,245 292.5,290 337.5,290 742.5,290 787.5,290 1012.5,290 1057.5,290 1102.5,290 90,335 135,335 180,335 225,335 270,335 315,335 360,335 720,335 765,335 810,335 855,335 900,335 945,335 990,335 1035,335 1080,335 112.5,380 157.5,380 202.5,380 247.5,380 292.5,380 337.5,380 742.5,380 787.5,380 832.5,380 877.5,380 922.5,380 967.5,380 1012.5,380 1057.5,380 1102.5,380 135,425 360,425 720,425 765,425 810,425 855,425 900,425 945,425 990,425 1035,425 1080,425 742.5,470 787.5,470 832.5,470 877.5,470 922.5,470 967.5,470 1012.5,470 1057.5,470 1102.5,470 315,515 675,515 720,515 765,515 810,515 855,515 900,515 945,515 990,515 1035,515 1080,515 585,605 1215,695 1935,695 1980,695 2025,695 2070,695 2115,695 2160,695 2205,695 2250,695 2295,695 2340,695 2385,695 157.5,740 90,875 1215,875 2115,875 2160,875 2205,875 2250,875 2295,875 2340,875 2385,875 2430,875 2475,875 2520,875 2565,875 112.5,920 2137.5,920 2182.5,920 2227.5,920 2542.5,920 2587.5,920 90,965 1215,965 1800,965 1845,965 1980,965 2025,965 2070,965 2115,965 2160,965 2565,965 112.5,1010 1777.5,1010 1822.5,1010 2047.5,1010 2092.5,1010 2452.5,1010 90,1055 135,1055 1215,1055 1800,1055 1845,1055 2025,1055 2070,1055 2205,1055 2430,1055 2475,1055 112.5,1100 2047.5,1100 2182.5,1100 2227.5,1100 2407.5,1100 2452.5,1100 2497.5,1100 180,1145 225,1145 270,1145 315,1145 360,1145 405,1145 495,1145 1215,1145 1395,1145 1440,1145 2025,1145 202.5,1190 247.5,1190 292.5,1190 337.5,1190 382.5,1190 517.5,1190 1417.5,1190 1462.5,1190 180,1235 225,1235 495,1235 2025,1235 202.5,1280 517.5,1280 1822.5,1280 1912.5,1280 1957.5,1280 2002.5,1280 2047.5,1280 2272.5,1280 3037.5,1280 180,1325 225,1325 495,1325 1800,1325 1935,1325 1980,1325 2025,1325 2205,1325 2250,1325 2295,1325 2385,1325 2430,1325 2475,1325 2520,1325 2565,1325 202.5,1370 1822.5,1370 1912.5,1370 1957.5,1370 2002.5,1370 2137.5,1370 2182.5,1370 2227.5,1370 2272.5,1370 2317.5,1370 2362.5,1370 2407.5,1370 2452.5,1370 2497.5,1370 2542.5,1370 2587.5,1370 2992.5,1370 3037.5,1370 180,1415 225,1415 270,1415 315,1415 360,1415 405,1415 585,1415 1935,1415 562.5,1460 607.5,1460 2047.5,1460 2182.5,1460 2227.5,1460 2272.5,1460 2407.5,1460 2452.5,1460 2497.5,1460 2992.5,1460 90,1505 135,1505 585,1505 1800,1505 2025,1505 2160,1505 2205,1505 2250,1505 2430,1505 2475,1505 4050,1505 4095,1505 4140,1505 4185,1505 4230,1505 4275,1505 202.5,1550 247.5,1550 292.5,1550 337.5,1550 1822.5,1550 2047.5,1550 2182.5,1550 2227.5,1550 2452.5,1550 2497.5,1550 4072.5,1550 4117.5,1550 4162.5,1550 4207.5,1550 4252.5,1550 456,1577 225,1595 270,1595 315,1595 360,1595 1215,1595 1440,1595 1485,1595 1530,1595 1575,1595 1800,1595 2160,1595 2205,1595 2250,1595 2430,1595 2475,1595 479.91,1610.76 247.5,1640 292.5,1640 337.5,1640 382.5,1640 2047.5,1640 1215,1685 1440,1685 3375,1685 3420,1685 3465,1685 427.5,1730 472.5,1730 877.5,1730 967.5,1730 1012.5,1730 1057.5,1730 1102.5,1730 3397.5,1730 3442.5,1730 3487.5,1730 225,1775 450,1775 495,1775 1215,1775 1440,1775 2295,1775 3375,1775 3420,1775 3465,1775 112.5,1820 157.5,1820 202.5,1820 247.5,1820 382.5,1820 427.5,1820 1462.5,1820 2047.5,1820 2542.5,1820 2587.5,1820 3307.5,1820 3352.5,1820 3397.5,1820 3442.5,1820 3487.5,1820 90,1865 135,1865 180,1865 225,1865 270,1865 1215,1865 1440,1865 1485,1865 1530,1865 1665,1865 1755,1865 1800,1865 1980,1865 2025,1865 3015,1865 3060,1865 3105,1865 112.5,1910 157.5,1910 202.5,1910 247.5,1910 2002.5,1910 2047.5,1910 2227.5,1910 2452.5,1910 2497.5,1910 2992.5,1910 90,1955 135,1955 180,1955 225,1955 270,1955 405,1955 450,1955 495,1955 540,1955 1530,1955 1575,1955 1620,1955 1800,1955 1980,1955 2025,1955 2205,1955 2250,1955 2430,1955 112.5,2000 157.5,2000 202.5,2000 247.5,2000 292.5,2000 1507.5,2000 1552.5,2000 1597.5,2000 1822.5,2000 2047.5,2000 2227.5,2000 2452.5,2000 90,2045 135,2045 180,2045 225,2045 270,2045 315,2045 360,2045 405,2045 450,2045 495,2045 540,2045 1170,2045 1215,2045 1260,2045 1485,2045 1530,2045 1575,2045 1620,2045 2025,2045 2205,2045 2250,2045 2430,2045 4005,2045 4050,2045 4095,2045 4275,2045 112.5,2090 157.5,2090 202.5,2090 247.5,2090 292.5,2090 337.5,2090 382.5,2090 427.5,2090 472.5,2090 517.5,2090 562.5,2090 1147.5,2090 1192.5,2090 1237.5,2090 1597.5,2090 2047.5,2090 3937.5,2090 3982.5,2090 4027.5,2090 3136,2116 90,2135 135,2135 180,2135 225,2135 270,2135 315,2135 360,2135 405,2135 450,2135 1980,2135 2025,2135 3285,2135 3465,2135 3510,2135 3555,2135 3600,2135 3645,2135 3690,2135 3735,2135 3780,2135 3825,2135 3870,2135 3915,2135 3960,2135 4005,2135 112.5,2180 157.5,2180 202.5,2180 247.5,2180 292.5,2180 337.5,2180 382.5,2180 1417.5,2180 1462.5,2180 3082.5,2180 3982.5,2180 90,2225 135,2225 180,2225 225,2225 270,2225 315,2225 360,2225 630,2225 675,2225 720,2225 765,2225 810,2225 1080,2225 1125,2225 1170,2225 1215,2225 1665,2225 4005,2225 112.5,2270 157.5,2270 202.5,2270 247.5,2270 292.5,2270 337.5,2270 382.5,2270 607.5,2270 652.5,2270 697.5,2270 742.5,2270 787.5,2270 832.5,2270 1057.5,2270 1102.5,2270 1147.5,2270 1192.5,2270 1462.5,2270 1507.5,2270 1552.5,2270 3982.5,2270 4027.5,2270 90,2315 135,2315 180,2315 225,2315 270,2315 315,2315 360,2315 405,2315 4005,2315 4050,2315 4275,2315 112.5,2360 157.5,2360 202.5,2360 247.5,2360 292.5,2360 337.5,2360 382.5,2360 3982.5,2360 4027.5,2360 4072.5,2360 4117.5,2360 4162.5,2360 4207.5,2360 4252.5,2360 90,2405 135,2405 180,2405 225,2405 270,2405 315,2405 360,2405 585,2405 630,2405 675,2405 720,2405 765,2405 810,2405 4005,2405 4050,2405 4095,2405 4140,2405 4185,2405 4230,2405 4275,2405 112.5,2450 292.5,2450 337.5,2450 382.5,2450 472.5,2450 607.5,2450 652.5,2450 697.5,2450 742.5,2450 787.5,2450 832.5,2450 1057.5,2450 1102.5,2450 1147.5,2450 1192.5,2450 1237.5,2450 1462.5,2450 1507.5,2450 1552.5,2450 1597.5,2450 1642.5,2450 1687.5,2450 1822.5,2450 2002.5,2450 3982.5,2450 4027.5,2450 4207.5,2450 4252.5,2450 315,2495 360,2495 585,2495 630,2495 675,2495 720,2495 765,2495 810,2495 1080,2495 1125,2495 1170,2495 1215,2495 1440,2495 1485,2495 1530,2495 1575,2495 1620,2495 1665,2495 1710,2495 2025,2495 2565,2495 2745,2495 4005,2495 4275,2495 337.5,2540 607.5,2540 652.5,2540 697.5,2540 742.5,2540 787.5,2540 1057.5,2540 1102.5,2540 1147.5,2540 1192.5,2540 1552.5,2540 1597.5,2540 1642.5,2540 1867.5,2540 2722.5,2540 3982.5,2540 360,2585 630,2585 675,2585 720,2585 765,2585 810,2585 1080,2585 1125,2585 1170,2585 1215,2585 1575,2585 2745,2585 4005,2585 4275,2585 337.5,2630 382.5,2630 427.5,2630 472.5,2630 2722.5,2630 3982.5,2630 4252.5,2630 90,2675 270,2675 315,2675 360,2675 405,2675 450,2675 495,2675 1440,2675 1485,2675 2700,2675 2745,2675 4005,2675 4050,2675 4230,2675 4275,2675
  other v2: 3070,1666
HEATER_1: P11.4 R14.2 R16.1 | length 1565.5
  Top Layer w10: P11.4@2297.64,2565.96 cw(c2265.85,2534.17) 2310.81,2534.17 cw(c2355.77,2534.17) P11.4@2323.98,2565.96 ; P11.4@2310.81,2587 2310.81,2419.19 2409,2321 2824,2321 2909,2236 2909,1998 2937,1970 3000,1970 3030,2000 3070,2000 3097.06,2027.06 R14.2@3127,2027.06 3185.94,2027.06 R16.1@3188,2025 ; R14.2@3117.84,2020.85 ccw(c3102.85,2005.86) 3102.85,2027.06 ccw(c3102.85,2048.25) R14.2@3117.84,2033.26 ; R14.2@3136.16,2020.85 cw(c3151.15,2005.86) 3151.15,2027.06 cw(c3151.15,2048.25) R14.2@3136.16,2033.26 ; 3158.89,2027.06 cw(c3158.89,1998.84) R16.1@3178.84,2018.79 ; 3168.81,2027.06 ccw(c3168.81,2041.23) R16.1@3178.84,2031.21
HEATER_2: P11.5 R31.2 R33.1 | length 2093.6
  Top Layer w10: P11.5@2218.9,2565.96 cw(c2187.11,2534.17) 2232.07,2534.17 cw(c2277.03,2534.17) P11.5@2245.24,2565.96 ; P11.5@2232.07,2587 2232.07,2397.93 2328,2302 2814,2302 2887.89,2228.11 2887.89,1549.17 2907.06,1530 2960,1530 3000,1570 3050,1570 3068.06,1588.06 R31.2@3120,1588.06 3181.94,1588.06 R33.1@3184,1586 ; R31.2@3110.84,1581.85 ccw(c3095.85,1566.86) 3095.85,1588.06 ccw(c3095.85,1609.25) R31.2@3110.84,1594.26 ; R31.2@3129.16,1581.85 cw(c3144.15,1566.86) 3144.15,1588.06 cw(c3144.15,1609.25) R31.2@3129.16,1594.26 ; 3154.89,1588.06 cw(c3154.89,1559.84) R33.1@3174.84,1579.79 ; 3164.81,1588.06 ccw(c3164.81,1602.23) R33.1@3174.84,1592.21
HEATER_3: P11.6 R15.2 R17.1 | length 2559.7
  Top Layer w10: P11.6@2138.19,2568.96 cw(c2106.4,2537.17) 2151.36,2537.17 cw(c2196.32,2537.17) P11.6@2164.53,2568.96 ; P11.6@2151.36,2590 2151.36,2378.64 2246,2284 2770.54,2284 2869.89,2184.65 2869.89,1139.11 2899,1110 2940,1110 2970,1140 3040,1140 3066.06,1166.06 R15.2@3100,1166.06 3167.94,1166.06 R17.1@3168,1166 ; R15.2@3090.84,1159.85 ccw(c3075.85,1144.86) 3075.85,1166.06 ccw(c3075.85,1187.25) R15.2@3090.84,1172.26 ; R15.2@3109.16,1159.85 cw(c3124.15,1144.86) 3124.15,1166.06 cw(c3124.15,1187.25) R15.2@3109.16,1172.26 ; 3143.72,1166.06 cw(c3143.72,1144.67) R17.1@3158.84,1159.79 ; 3143.98,1166.06 ccw(c3143.98,1187.06) R17.1@3158.84,1172.21
HEATER_4: P11.7 R32.2 R34.1 | length 2883
  Top Layer w10: P11.7@2072.62,2590 2072.62,2414.38 2221,2266 2763.09,2266 2851.89,2177.2 2851.89,793.11 2895,750 2940,750 2970,780 3030,780 3060.06,810.06 R32.2@3089,810.06 3154.94,810.06 R34.1@3155,810 ; R32.2@3079.84,803.85 ccw(c3064.85,788.86) 3064.85,810.06 ccw(c3064.85,831.25) R32.2@3079.84,816.26 ; R32.2@3098.16,803.85 cw(c3113.15,788.86) 3113.15,810.06 cw(c3113.15,831.25) R32.2@3098.16,816.26 ; 3130.72,810.06 cw(c3130.72,788.67) R34.1@3145.84,803.79 ; 3130.98,810.06 ccw(c3130.98,831.06) R34.1@3145.84,816.21
NetC4_1: C4.1 R68.2 U5.1 | length 360
  Top Layer w10: R68.2@519,1670.95 521.95,1668 C4.1@631,1668 629.47,1669.53 U5.1@629.47,1802.74 ; C4.1@614.71,1657.62 ccw(c589.64,1632.55) 589.64,1668 ccw(c589.64,1703.45) C4.1@614.71,1678.38 ; C4.1@620.62,1678.38 ccw(c599.24,1699.76) 629.47,1699.76 ; 629.47,1707.15 ccw(c670.15,1707.15) C4.1@641.38,1678.38
NetC5_1: C5.1 R67.2 | length 287.9
  Top Layer w10: R67.2@310,1726 321.78,1726 R67.2@323,1727.22
  Top Layer w20: C5.1@124,1726 R67.2@310,1726 ; C5.1@164.31,1719.15 cw(c180.85,1702.62) 180.85,1726 cw(c180.85,1749.38) C5.1@164.31,1732.85 ; 241.89,1726 ccw(c241.89,1763.05) R67.2@268.09,1736.85 ; 247.78,1726 cw(c247.78,1697.28) R67.2@268.09,1717.59
NetC6_2: C6.2 R71.1 U5.6 U5.7 | length 523.9
  Top Layer w10: U5.7@724.26,1877.84 U5.6@724.26,1858.16 778.11,1858.16 786.27,1850 1095.11,1850 ; C6.2@1088.9,1873.84 cw(c1073.91,1858.85) 1095.11,1858.85 cw(c1116.31,1858.85) C6.2@1101.32,1873.84 ; R71.1@1089.85,1829.16 ccw(c1077.14,1841.87) 1095.11,1841.87 ; 1095.11,1846.43 ccw(c1119.53,1846.43) R71.1@1102.26,1829.16 ; C6.2@1095.11,1883 1095.11,1850 ; R71.1@1096.06,1820 1095.11,1820.94 1095.11,1850
NetC7_1: C7.1 D14.1 D14.2 U5.12 | length 649.2
  Top Layer w10: D14.2@325.53,1846.08 ccw(c313.9,1857.7) 330.35,1857.7 ccw(c346.79,1857.7) D14.2@335.16,1846.08 ; D14.1@325.53,1915.18 cw(c313.9,1903.56) 330.35,1903.56 cw(c346.79,1903.56) D14.1@335.16,1915.18 ; D14.1@325.53,1924.82 ccw(c313.9,1936.44) 330.35,1936.44 ccw(c346.79,1936.44) D14.1@335.16,1924.82 ; D14.2@330.35,1841.26 D14.1@330.35,1920 330.35,1960.35 376,2006 C7.1@622,2006 622,1978 628.65,1971.35 U5.12@628.65,1933.26 ; C7.1@612.84,1999.79 ccw(c597.85,1984.8) 597.85,2006 ccw(c597.85,2027.2) C7.1@612.84,2012.21 ; C7.1@615.79,1999.79 cw(c600.8,1984.8) 622,1984.8 cw(c643.2,1984.8) C7.1@628.21,1999.79
NetC9_1: C9.1 R73.2 R76.1 U5.8 | length 473.9
  Top Layer w10: U5.8@724.26,1897.53 750,1897.53 760,1897.53 ; R73.2@910.74,2061.84 cw(c895.75,2046.85) 916.94,2046.85 cw(c938.14,2046.85) R73.2@923.15,2061.84 ; R76.1@910.79,2010.81 ccw(c895.94,2025.67) 916.94,2025.67 ; 916.94,2025.93 ccw(c938.33,2025.93) R76.1@923.21,2010.81 ; R73.2@916.94,2071 916.94,2001.71 R76.1@917,2001.65
  Top Layer w15: 760,1897.53 797.53,1897.53 850,1950 C9.1@850,2002 916.65,2002 R76.1@916.94,2001.71 ; C9.1@845.56,1997.56 cw(c834.84,1986.84) 850,1986.84 cw(c865.16,1986.84) C9.1@854.44,1997.56 ; C9.1@857.39,1997.56 cw(c868.11,1986.84) 868.11,2002 cw(c868.11,2017.16) C9.1@857.39,2006.44 ; 901,2002 cw(c901,1985.66) R76.1@912.56,1997.21 ; 902.68,2002 ccw(c902.68,2015.98) R76.1@912.56,2006.09
NetC11_1: C11.1 U5.14 | length 158.2
  Top Layer w10: C11.1@503,1901 511,1893 559.53,1893 573.61,1878.92 573.61,1877.84 U5.14@593.74,1877.84 ; C11.1@505.09,1900.14 ccw(c522.32,1917.37) 522.32,1893 ; C11.1@512.16,1907.21 ccw(c546.46,1941.51) 546.46,1893
NetC11_2: C11.2 D14.3 U5.16 | length 301.2
  Top Layer w10: D14.3@428.77,1880.63 449.37,1880.63 ; D14.3@440.8,1875.23 cw(c447.72,1866.25) 455.73,1874.27 ; D14.3@442.31,1876.85 cw(c449.37,1872.15) 449.37,1880.63 ; D14.3@442.31,1884.41 ccw(c449.37,1889.11) 449.37,1880.63 ; 464.59,1865.41 ccw(c500.05,1900.87) C11.2@500.05,1850.72 ; 481.66,1848.34 ccw(c500.05,1866.73) C11.2@500.05,1840.72 ; C11.2@512.16,1848.15 ccw(c535.54,1871.53) 535.54,1838.47 ; U5.16@593.74,1838.47 506.47,1838.47 C11.2@503,1841.94 488.06,1841.94 449.37,1880.63